# Altium PCB Youtube_Motherboard.PcbDoc
Units mm, origin at the board's own origin, x right, y up, seen from the top; angles counter-clockwise.
Board outline 40 x 40 mm, 2 copper layers (Top Layer, Bottom Layer); 4 components, 4 nets, 37 pads, 4 vias.
Unrouted connection lines stored in the file: 4.
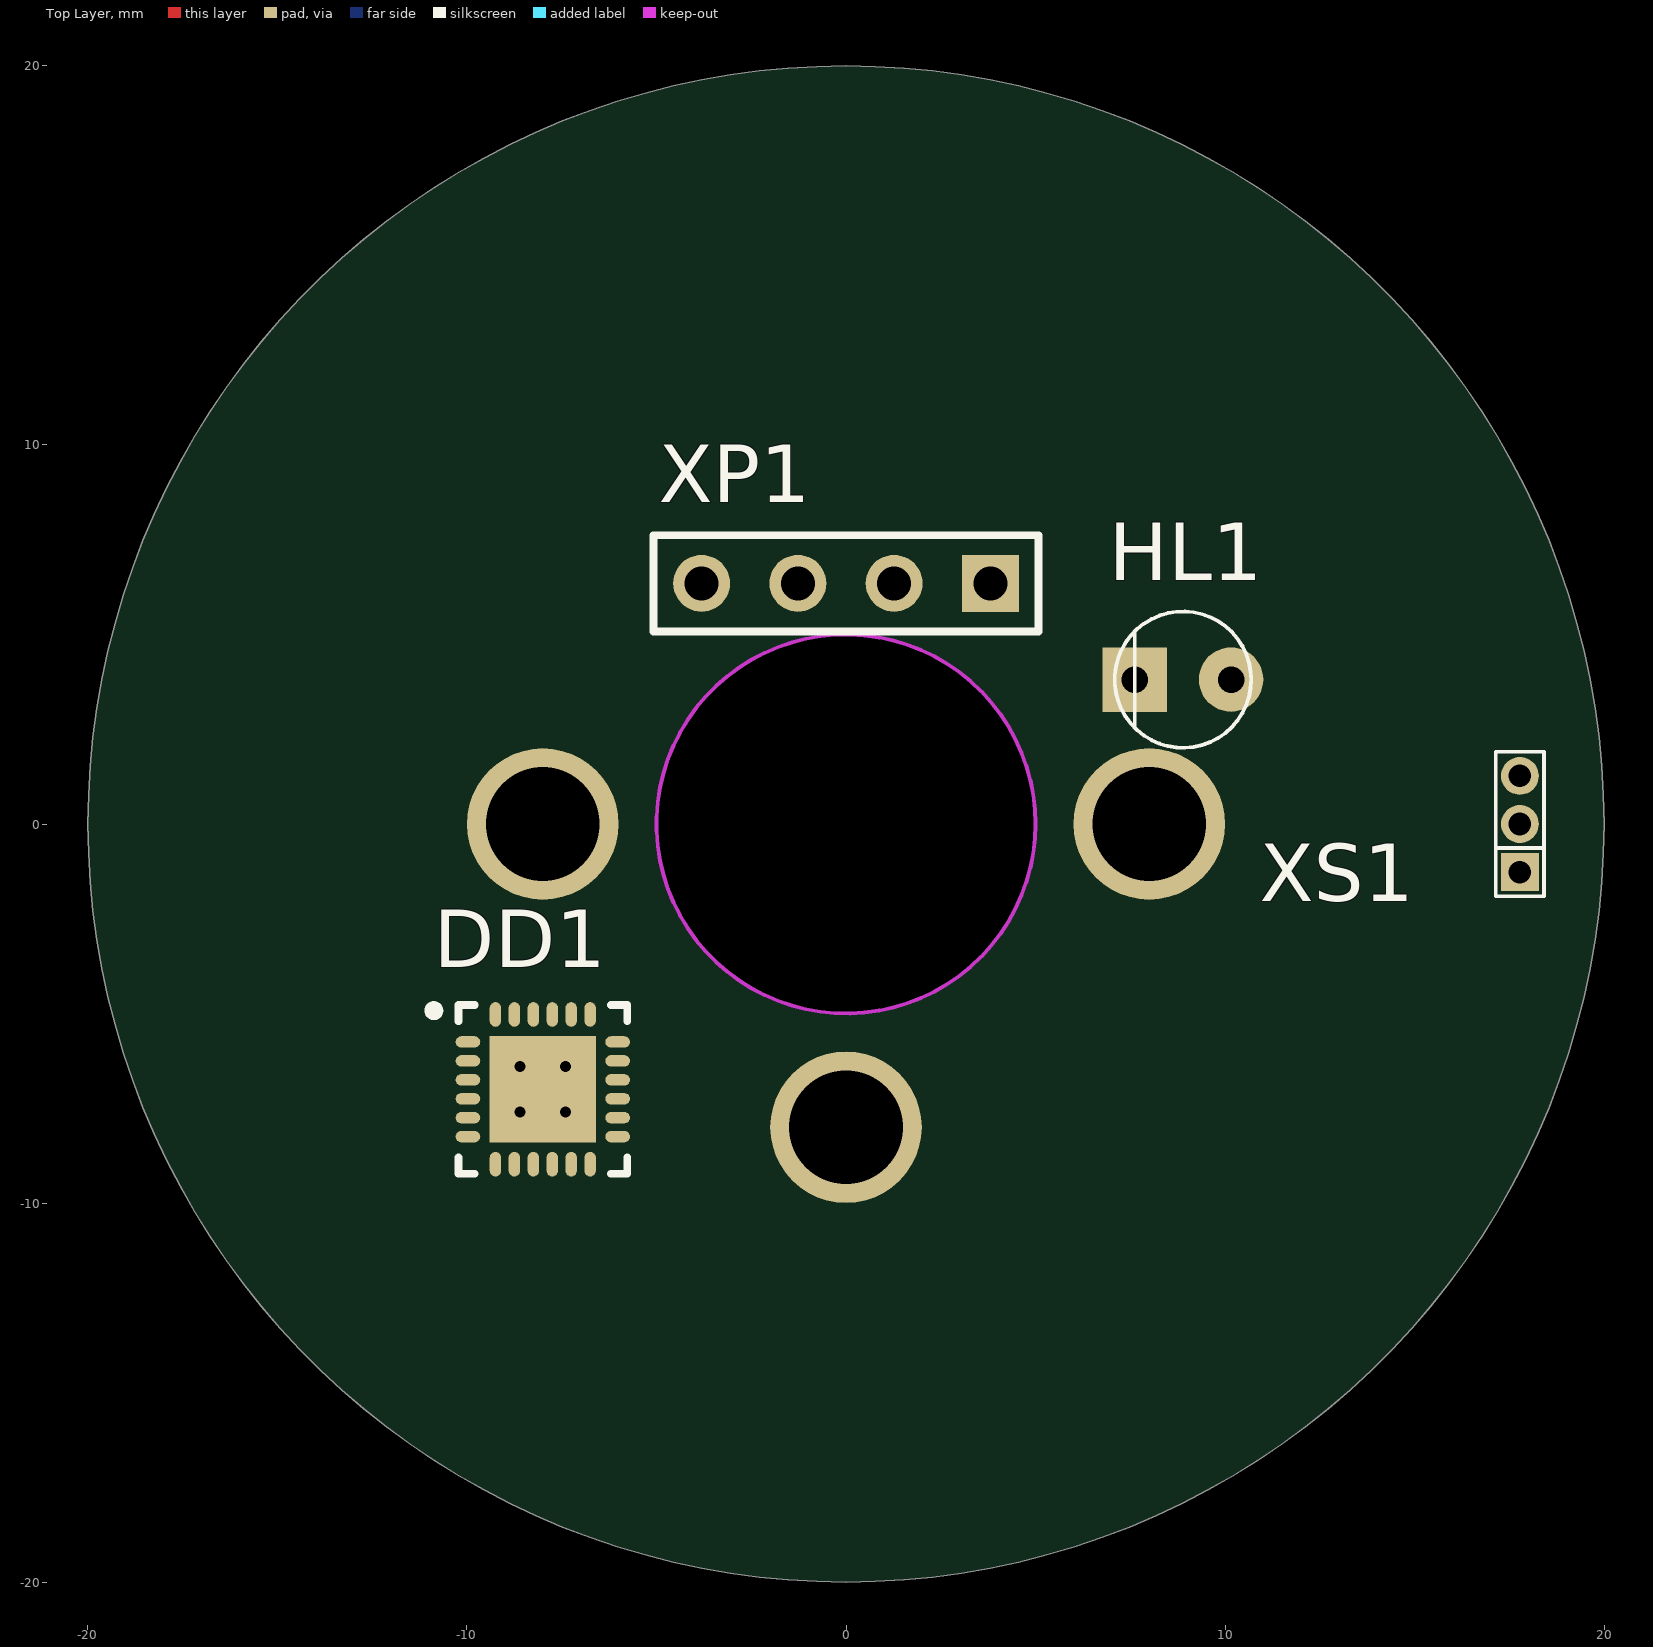
[diagram p0: Top Layer view]
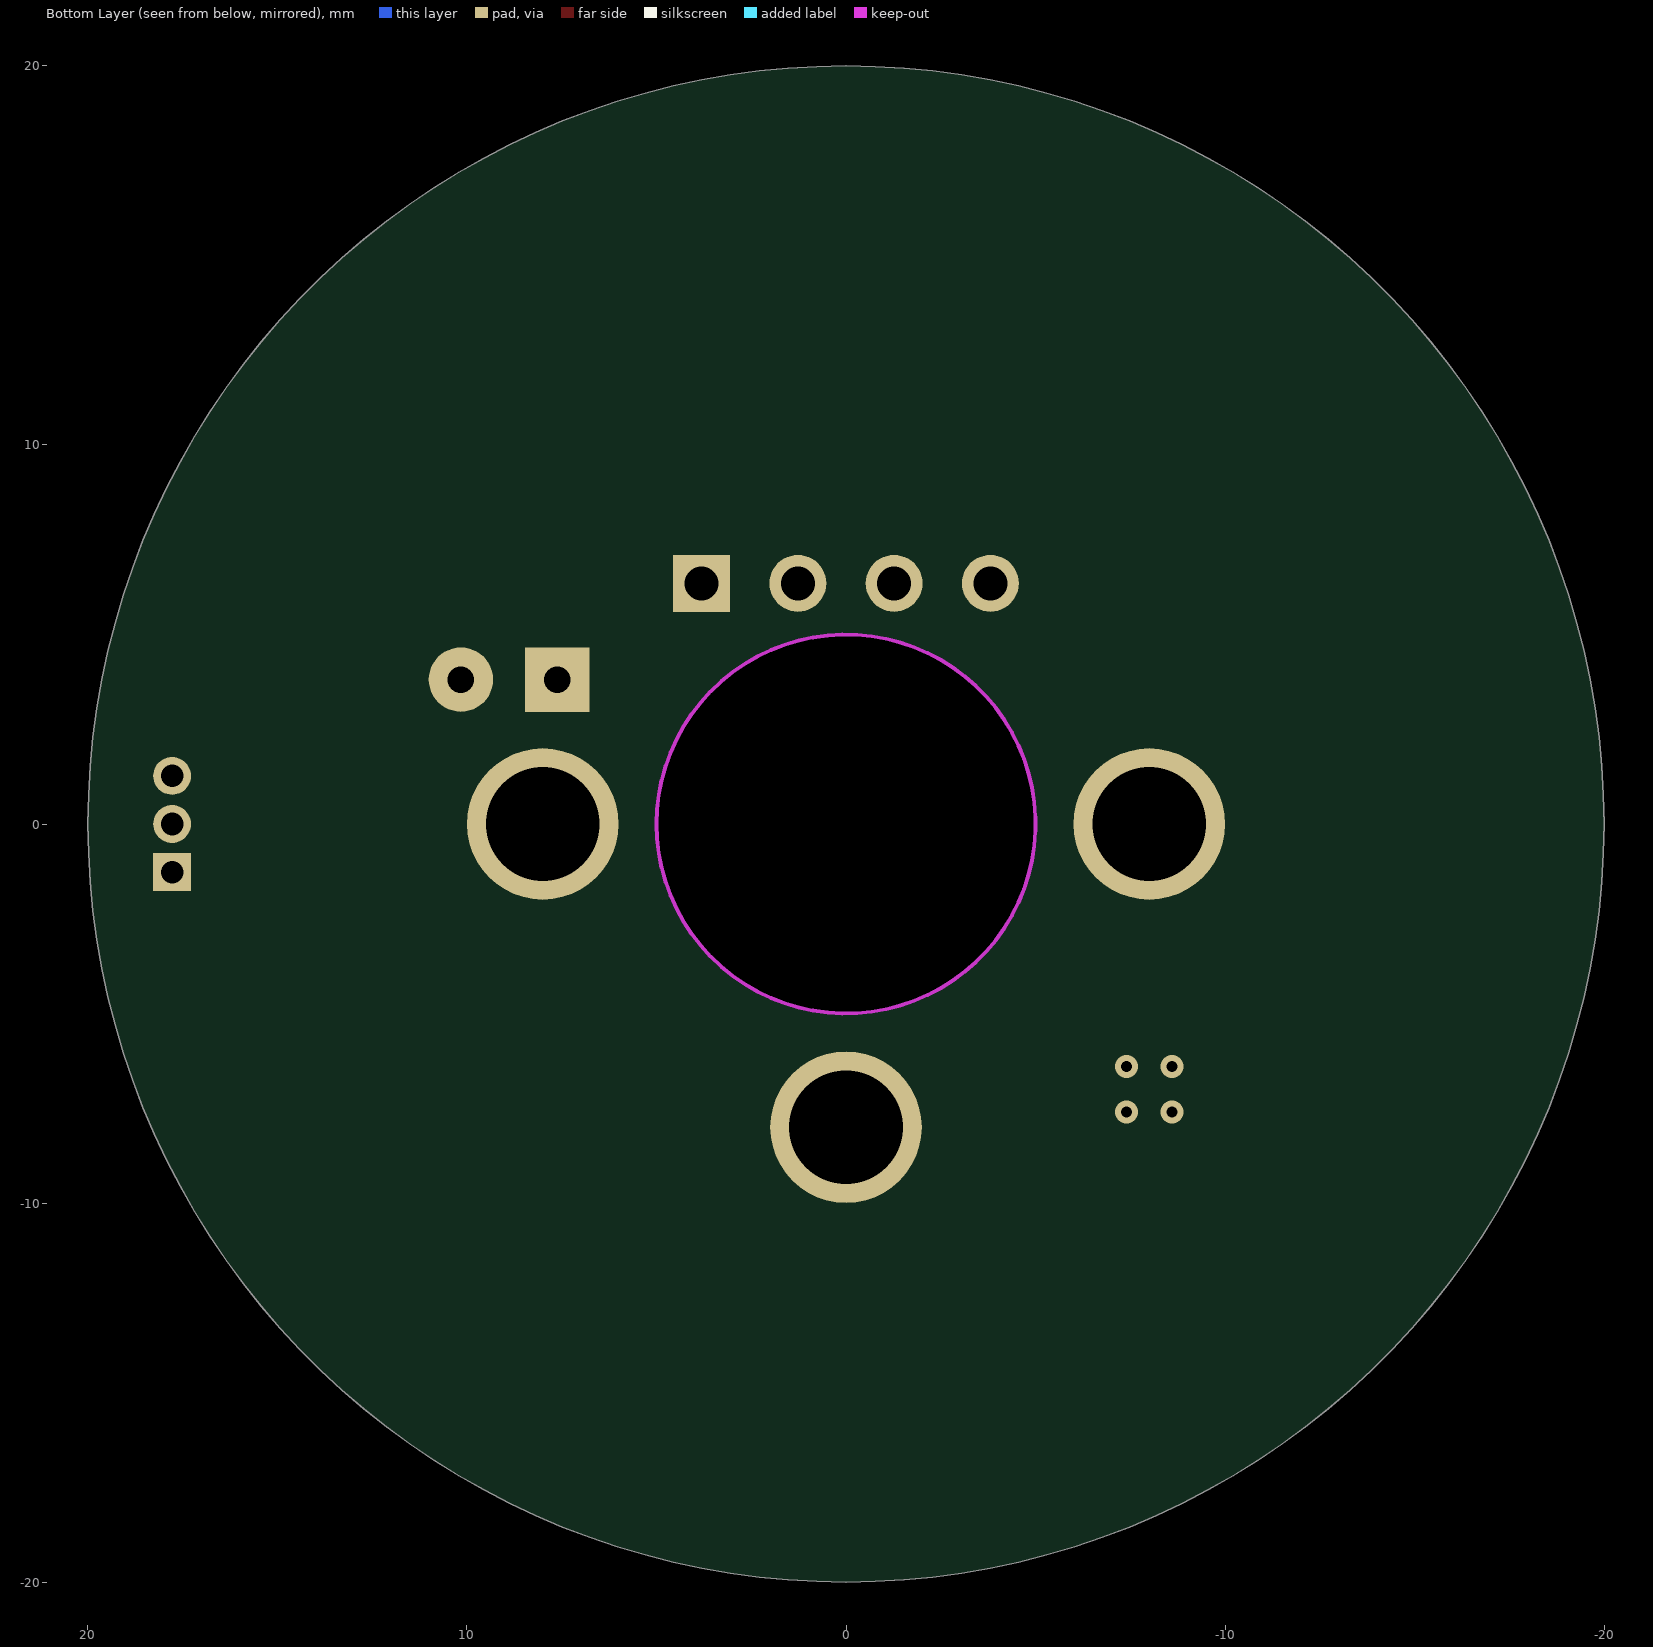
[diagram p1: Bottom Layer view, seen from below]

## Layer stack, top to bottom
Top Solder: solder mask 0.0102, Solder Resist, Dk 3.5
Top Layer: signal copper 0.0356
Dielectric 1: dielectric 0.32, FR-4, Dk 4.8
Bottom Layer: signal copper 0.0356
Bottom Solder: solder mask 0.0102, Solder Resist, Dk 3.5

## Board outline
-20,0 ccw(c0,0) 0,-20 ccw(c0,0) 20,0 ccw(c0,0) 0,20 ccw(c0,0)
cut-out: -5,0 ccw(c0,0) 0,-5 ccw(c0,0) 5,0 ccw(c0,0) 0,5 ccw(c0,0)

## Design rules (kind name [scope] priority, off if disabled: settings)
Clearance [All] p1: gap=0.254 ignorepadtopadclearanceinfootprint=FALSE except(0: Arc-Hole Track-Hole SMDPad-Hole THPad-Hole Via-Hole Fill-Hole Poly-Hole Region-Hole Text-Hole)
PolygonConnect [All] p1: connectstyle=Relief reliefconductorwidth=0.254 reliefentries=4 polygonreliefangle="90 Angle" airgapwidth=0.254
RoutingVias [All] p1: holewidth=0.711 width=1.27 viastyle="Through Hole" minholewidth=0.711 minwidth=1.27 maxholewidth=0.711 maxwidth=1.27
SolderMaskExpansion [All] p1: expansion=0.102 istentingtop=FALSE
Width [All] p1: maxlimit=0.254 minlimit=0.254 preferedwidth=0.254
30 further rules are at their usual default settings.

## Components (designator, comment, footprint, x,y, rotation, side; value= is the part's Value field where it differs from the comment)
DD1 "ATSAML10D16A-MUT" VQFN-24 -8,-7 r0 top
HL1 "FYL-5013 HD" LED_3MM_RED 7.62,3.81 r0 top
XP1 "PLS-4" PLS-4-3D 3.81,6.35 r180 top
XS1 "M50-3030342" PBLS-1.27-3 17.78,-1.27 r0 top

## Footprints (in the part's own frame and the unit in brackets; to place one, negate y for a bottom-side part, rotate by r counter-clockwise, add the part's x,y. Pads: shape width x height; smd on the part's side, far side on the other; paste and mask are expansions set on the pad)
LED_3MM_RED [mm]
  rect 1.7x1.7 hole 0.7: 1(0,0)
  round 1.7 hole 0.7: 2(2.54,0)
  silkscreen extent -0.53,-1.8 3.07,1.8, body extent -0.39,-1.65 2.91,1.65, height 5.51
PBLS-1.27-3 [mm]
  rect 1x1 hole 0.6: 1(0,0)
  round 1 hole 0.6: 2(0,1.27) 3(0,2.54)
  silkscreen extent -0.64,-0.64 0.64,3.17
PLS-4-3D [mm] "Connector; Header; 4 Position"
  rect 1.5x1.5 hole 0.9: 1(0,0)
  round 1.5 hole 0.9: 2(2.54,0) 3(5.08,0) 4(7.62,0)
  silkscreen extent -1.27,-1.27 8.89,1.27, body extent -1.27,-1.27 8.89,1.27, height 8.44
VQFN-24 [mm] "QFN, 24-Leads, Body 4x4mm, Pitch 0.5mm, IPC High Density"
  oval 0.65x0.3 smd: 1(-1.975,1.25) 2(-1.975,0.75) 3(-1.975,0.25) 4(-1.975,-0.25) 5(-1.975,-0.75) 6(-1.975,-1.25) 13(1.975,-1.25) 14(1.975,-0.75) 15(1.975,-0.25) 16(1.975,0.25) 17(1.975,0.75) 18(1.975,1.25)
  oval 0.3x0.65 smd: 7(-1.25,-1.975) 8(-0.75,-1.975) 9(-0.25,-1.975) 10(0.25,-1.975) 11(0.75,-1.975) 12(1.25,-1.975) 19(1.25,1.975) 20(0.75,1.975) 21(0.25,1.975) 22(-0.25,1.975) 23(-0.75,1.975) 24(-1.25,1.975)
  rect 2.8x2.8 smd: 25(0,0)
  silkscreen extent -3,-2.22 2.22,2.22, body extent -2.05,-2.07 2.05,2.03, height 1

## Part data
DD1: "IC MCU 32BIT 64KB FLASH 24VQFN,ARM® Cortex®-M23", Digi-Key Part Number=ATSAML10D16A-MUTCT-ND, Package=VQFN-24, HelpURL=https://www.digikey.com/product-detail/en/microchip-technology/ATSAML10D16A-MUT/ATSAML10D16A-MUTCT-ND/9360576, Manufacturer Part Number=ATSAML10D16A-MUT, Part Number=ATSAML10D16A-MUT, Price$=1.82
XP1: library part G800W304018EU, "Headers & Wire Housings Pin Header 2.54mm Pitch STR DIP,1x4Pin,FULL G/F,NY6T,6.1mm*2.5mm*3.0mm,Color-Black,BAG", Mouser Part Number=523-G800W304018EU, Package="Header 4POS 2.54mm", HelpURL=https://www.mouser.com/ProductDetail/Amphenol-Commercial-Products/G800W304018EU?qs=f9yNj16SXrKi9QS16pMdvA%3D%3D, Manufacturer Part Number=G800W304018EU, Part Number=G800W304018EU, Price$=0.042, System=Connector
XS1: "Headers & Wire Housings 3 WAY SIL VERT PC TAIL SKT", Mouser Part Number=855-M50-3030342, HelpURL=https://eu.mouser.com/ProductDetail/Harwin/M50-3030342?qs=sGAEpiMZZMs%252BGHln7q6pm8Vn94ktop%2FJCT2ZrMcJQ%2F%2FaTd%2FpiUltJA%3D%3D, Manufacturer Part Number=M50-3030342, Part Number=M50-3030342, Price$=0.306
HL1: Part Number="FYL-5013 HD"

## Free pads (board coordinates)
  round 4 hole 3: 0(-8,0) 0(0,-8) 0(8,0)

## Via types
v1: diameter 0.6, hole 0.3, Top Layer to Bottom Layer, 4 vias

## Nets (pads, with @x,y where several pads share a name; then routed paths per layer and width w, separated by ;. In a path a pad name is that pad's centre, name@x,y a point inside that pad or via, vN(x,y) a via of type N, cw(c..) or ccw(c..) an arc to the next point about the centre after c; other vN are vias at no path point)
circuit1: DD1.17 XP1.3
circuit2: DD1.16 XP1.4
GND: HL1.2 XP1.2
VCC: HL1.1 XP1.1
pads on no net: DD1.1 DD1.2 DD1.3 DD1.4 DD1.5 DD1.6 DD1.7 DD1.8 DD1.9 DD1.10 DD1.11 DD1.12 DD1.13 DD1.14 DD1.15 DD1.18 DD1.19 DD1.20 DD1.21 DD1.22 DD1.23 DD1.24 DD1.25 XS1.1 XS1.2 XS1.3
copper on no net:
  other v1: -8.6,-7.6 -7.4,-7.6 -8.6,-6.4 -7.4,-6.4

## Keep-outs
Keep-Out Layer:
  circle w0.1: c0,0 r5

## Silkscreen, mask and mechanical layers (free items; w line width, h text height)
Mechanical 15:
  circle w0.1: c0,0 r20
  lines w0.1: 3.31,5.85 4.31,6.85 ; 3.31,6.85 4.31,5.85